# EAGLE board SparkFun RTK Facet - External Connector (EAGLE 9.6.2)
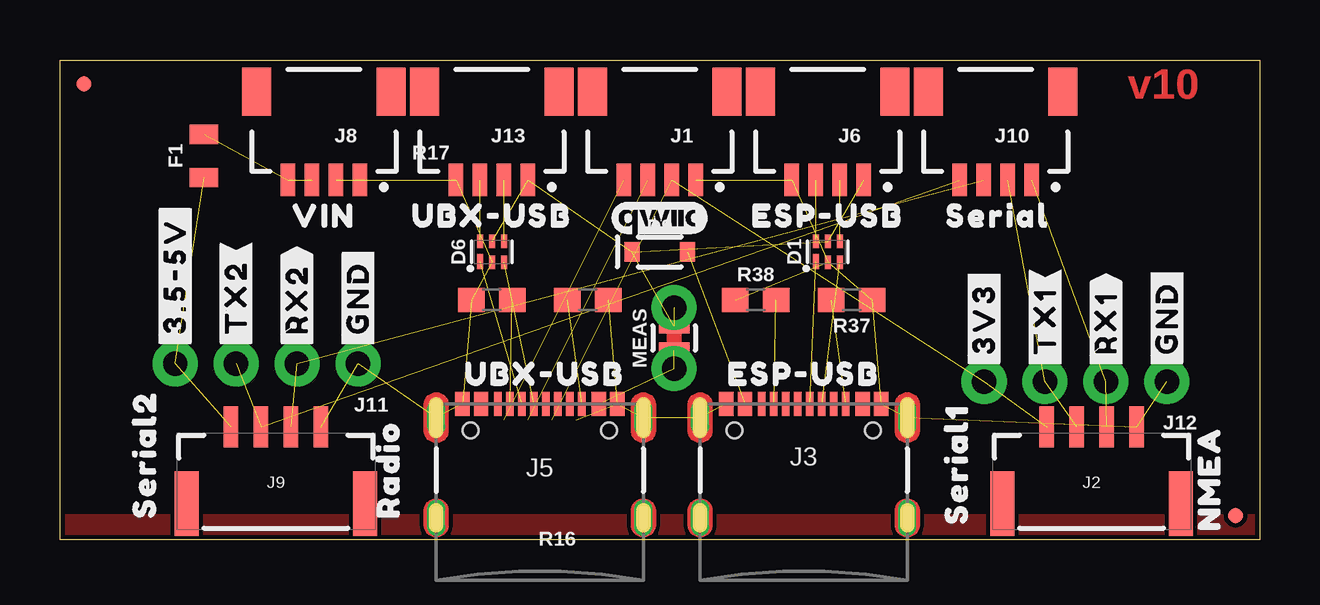
[diagram p0: board, top side]
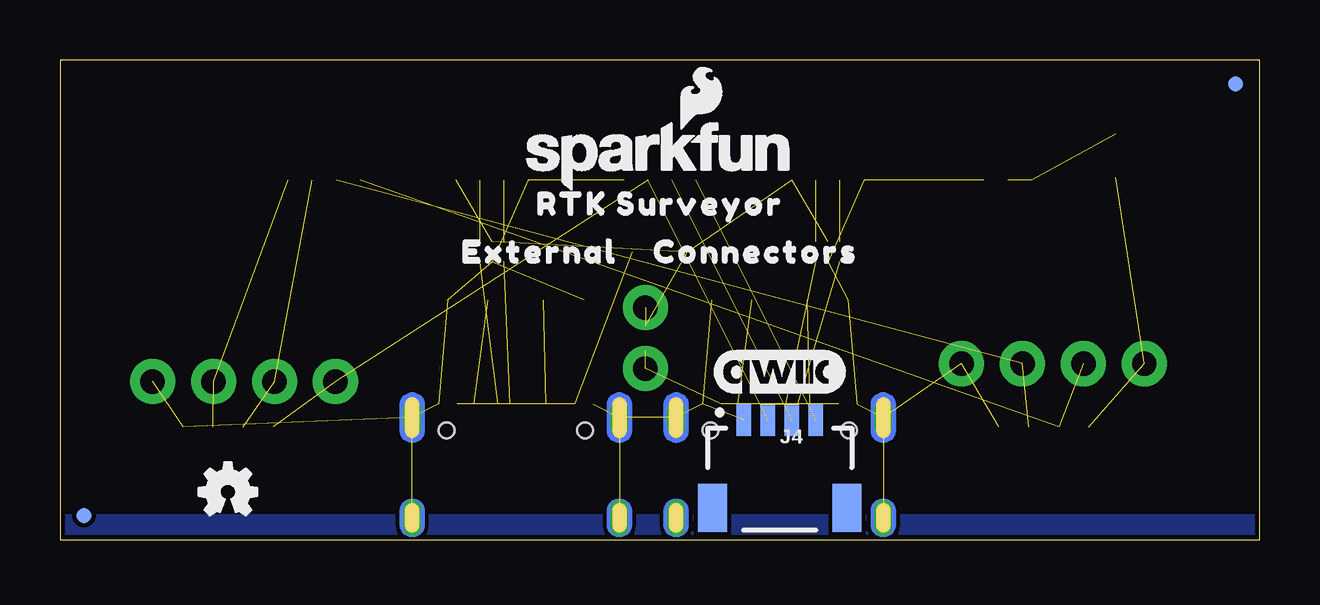
[diagram p1: board, bottom side, seen from below]

Size 50 x 20 mm. Coordinates in mm from the lower left corner, seen from the top.
Outline: 0,20 50,20 50,0 0,0 0,20
Copper layers (1*2*15*16): Top 0.035559375mm / dielectric 0.47751875mm / Horz/GND 0.035559375mm / dielectric 0.47751875mm / Vert 0.035559375mm / dielectric 0.47751875mm / Bottom 0.035559375mm
Design rules "SparkFun-4-layer-TIGHT *": minimum track width 7mil, minimum drill 12mil, track to track 7mil, track to pad 7mil, pad to pad 7mil, via to via 7mil, smd to smd 7mil, copper to edge 7mil, drill to drill 7mil, minimum pad ring 7mil, minimum via ring 7mil, stop-mask expansion 4mil, vias tented up to drill 25mil, thermal gap 10mil
Net classes: 1 power: width 0.559 mm; 2 3.3V: width 0.559 mm; 3 RF: width 0.35 mm, clearance 0.203 mm
tKeepout: area 0,0 to 2,20
bKeepout: area 48,0 to 50,20; area 0,0 to 2,20

## Footprints (pad centres in the part's own frame; a part is rotated, then mirrored left to right if it is on the bottom)
SOT886 = smd 0.61 x 0.25: 1 -0.405,0.5 | smd 0.56 x 0.25: 2 -0.43,0; 3 -0.43,-0.5; 4 0.43,-0.5; 5 0.43,0; 6 0.43,0.5
SOD-323 = smd 0.63 x 0.83: A 1.15,0; C -1.15,0
0805 = smd 0.8 x 1.2: 1 -0.9,0; 2 0.9,0
JST04_1MM_RA = smd 0.6 x 1.35: 1 -1.5,0; 2 -0.5,0; 3 0.5,0; 4 1.5,0 | smd 1.2 x 2: NC1 2.8,-3.675; NC2 -2.8,-3.675
JST-4-SMD-1.25MM-LOCKING = smd 0.6 x 1.7: 1 -1.875,3.3; 2 -0.625,3.3; 3 0.625,3.3; 4 1.875,3.3 | smd 1 x 2.7: NC1 3.725,0.1; NC2 -3.725,0.1
USB-C-16P-2LAYER-PADS = smd 0.3 x 1: A5 -1.25,-0.34; A6 -0.25,-0.34; A7 0.25,-0.34; A8 1.25,-0.34; B5 1.75,-0.34; B6 0.75,-0.34; B7 -0.75,-0.34; B8 -1.75,-0.34 | smd 0.6 x 1: GND -3.225,-0.34; GND2 3.225,-0.34; VBUS1 -2.45,-0.34; VBUS2 2.45,-0.34 | drill 0.4 pad 0.6 long: SHLD1 -4.318,-0.915; SHLD2 4.318,-0.915; SHLD3 -4.318,-5.095; SHLD4 4.318,-5.095 | hole 0.65: -2.89,-1.445; 2.89,-1.445
1X04_NO_SILK = drill 1.016 pad 1.88: 1 0,0; 2 2.54,0; 3 5.08,0; 4 7.62,0
FIDUCIAL-MICRO = smd 0.635 x 0.635: 1 0,0
COMBO-JUMPER_2_NC_TRACE = smd 0.635 x 1.27: 1 -0.508,0; 2 0.508,0 | drill 1.016 pad 1.88: 3 -1.27,0; 4 1.27,0
0603 = smd 1.1 x 1: 1 -0.85,0; 2 0.85,0

## Placement (x,y rotation side)
D1  PRTR5V0U2F  [SOT886]  32,12 90 top
D6  PRTR5V0U2F  [SOT886]  18,12 90 top
D9  3A/10V/280mV  [SOD-323]  25,12 0 top
F1  6V 0.5A  [0805]  6,16 90 top
FRAME1  FRAME-LETTER  [CREATIVE_COMMONS]  21,-10 0 top  (outside the outline)
J1  Qwiic  [JST04_1MM_RA]  25,15 180 top
J2  [JST-4-SMD-1.25MM-LOCKING]  43,1.4 0 top
J3  ESP32 USB  [USB-C-16P-2LAYER-PADS]  31,6 0 top
J4  Qwiic  [JST04_1MM_RA]  20,5 0 bottom
J5  u-blox USB  [USB-C-16P-2LAYER-PADS]  20,6 0 top
J6  [JST04_1MM_RA]  32,15 180 top
J8  [JST04_1MM_RA]  11,15 180 top
J9  [JST-4-SMD-1.25MM-LOCKING]  9,1.4 0 top
J10  [JST04_1MM_RA]  39,15 180 top
J11  [1X04_NO_SILK]  12.42,7.33 180 top
J12  [1X04_NO_SILK]  46.14,6.59 180 top
J13  [JST04_1MM_RA]  18,15 180 top
JP21  FIDUCIALUFIDUCIAL  [FIDUCIAL-MICRO]  49,1 0 top
JP61  FIDUCIALUFIDUCIAL  [FIDUCIAL-MICRO]  1,19 0 top
JP71  FIDUCIALUFIDUCIAL  [FIDUCIAL-MICRO]  49,1 0 bottom
JP81  FIDUCIALUFIDUCIAL  [FIDUCIAL-MICRO]  1,19 0 bottom
LOGO1  OSHW-LOGOMINI  [OSHW-LOGO-MINI]  43,2 0 bottom
LOGO2  SFE_LOGO_NAME_FLAME.1_INCH  [SFE_LOGO_NAME_FLAME_.1]  25,16 0 bottom
LOGO3  QWIIC_LOGO_CONNECTOR  [QWIIC_5.5MM]  20,7 0 bottom
MEAS  [COMBO-JUMPER_2_NC_TRACE]  25.6,8.4 90 top
R16  5.1k  [0603]  22,10 180 top
R17  5.1k  [0603]  18,10 0 top
R37  5.1k  [0603]  33,10 180 top
R38  5.1k  [0603]  29,10 0 top
U$1  [ESP#USB0]  32,13.5 0 top
U$2  [CONNECTORS1]  21,12 0 bottom
U$3  [SERIAL3]  39.1,13.5 0 top
U$4  [UBX#USB1]  18,13.5 0 top
U$5  [#3V3#0]  38.52,7 90 top
U$6  [VIN2]  11,13.5 0 top
U$7  [UBX#USB1]  20.2,6.9 0 top
U$8  [ESP#USB0]  31,6.9 0 top
U$9  [EXTERNAL0]  30,12 0 bottom
U$10  [RTK_SURVEYOR0]  25,14 0 bottom
U$23  [#3#5#5V#0]  4.8,7.84 90 top
U$29  [SERIAL10]  37.38,-0.03 90 top
U$30  [QWIIC_4MM]  25,13.4 0 top
U$38  [#GND#0]  12.42,7.84 90 top
U$39  [#RX2#2]  9.88,7.84 90 top
U$40  [#TX2#1]  7.34,7.84 90 top
U$43  [SERIAL20]  3.53,0.22 90 top
U$49  [NMEA1]  47.9,-0.3 90 top
U$50  [RADIO0]  13.69,0.22 90 top
U$65  [#TX1#1]  41.06,7 90 top
U$68  [#RX1#2]  43.6,7 90 top
U$82  [#GND#0]  46.14,7 90 top

## Library data of the parts
D1 D6 = SparkFun-IC-Power; PROD_ID: DIO-14084
D9 = SparkFun-DiscreteSemi; PROD_ID: DIO-14072
F1 = SparkFun-Fuses; PROD_ID: RES-13945
FRAME1 JP21 JP61 JP71 JP81 LOGO1-LOGO3 U$30 = SparkFun-Aesthetics
J1 = SparkFun-Connectors; PROD_ID: CONN-13694
J2 J9 = SparkFun-Connectors; PROD_ID: CONN-15303
J3 J5 = SparkFun-Connectors; PROD_ID: CONN-14122
J4 = SparkFun-Connectors; PROD_ID: CONN-13694; VALUE: Qwiic Right Angle
J6 J8 J10 J13 = SparkFun-Connectors; PROD_ID: CONN-10310; SF_ID: PRT-10208
J11 J12 = SparkFun-Connectors
MEAS = SparkFun-Jumpers
R16 R17 R37 R38 = SparkFun-Resistors; PROD_ID: RES-12083
U$1-U$10 U$23 U$29 U$38-U$40 U$43 U$49 U$50 U$65 U$68 U$82 = output

## Nets
3.3V [power]: J1.2 J2.1 J4.2 J12.4
CC1: J5.A5 R17.2
CC2: J5.B5 R16.2
CC3: J3.B5 R37.2
CC4: J3.A5 R38.2
ESP1_D_N: D1.1 J3.A7 J3.B7
ESP1_D_P: D1.3 J3.A6 J3.B6
ESP_21/SDA: J1.3 J4.3
ESP_22/SCL: J1.4 J4.4
ESP_D_N: D1.6 J6.3
ESP_D_P: D1.4 J6.2
EXTERNAL_SERIAL1_RXI: J2.3 J10.1 J12.2
EXTERNAL_SERIAL1_TXO: J2.2 J10.2 J12.3
GND: D1.2 D6.2 J1.1 J2.4 J3.GND J3.GND2 J3.SHLD1 J3.SHLD2 J3.SHLD3 J3.SHLD4 J4.1 J5.GND J5.GND2 J5.SHLD1 J5.SHLD2 J5.SHLD3 J5.SHLD4 J6.4 J8.1 J8.2 J9.4 J11.1 J12.1 J13.4 R16.1 R17.1 R37.1 R38.1
N$3 [power]: F1.1 J9.1 J11.4
N$4 [power]: J5.VBUS1 J5.VBUS2 MEAS.1 MEAS.3
N$32 [power]: D9.A J3.VBUS1 J3.VBUS2
UBX1_D_N: D6.1 J5.A7 J5.B7
UBX1_D_P: D6.3 J5.A6 J5.B6
UBX_D_N: D6.6 J13.3
UBX_D_P: D6.4 J13.2
V_BATT [power]: F1.2 J8.3 J8.4
VIN [power]: D1.5 D6.5 D9.C J6.1 J13.1 MEAS.2 MEAS.4
ZED-RXI2: J9.3 J10.3 J11.2
ZED-TXO2: J9.2 J10.4 J11.3

## Tracks (layer width: path | path; a pad name or v marks a point on that pad's centre or on a via)
3.3V  (3 unrouted)
CC1  (1 unrouted)
CC2  (1 unrouted)
CC3  (1 unrouted)
CC4  (1 unrouted)
ESP1_D_N  (2 unrouted)
ESP1_D_P  (2 unrouted)
ESP_21/SDA  (1 unrouted)
ESP_22/SCL  (1 unrouted)
ESP_D_N  (1 unrouted)
ESP_D_P  (1 unrouted)
EXTERNAL_SERIAL1_RXI  (2 unrouted)
EXTERNAL_SERIAL1_TXO  (2 unrouted)
GND  (24 unrouted)
  pour Top (isolate 0.152, rank 4): 0,1 50,1 50,0 0,0
  pour Bottom (isolate 0.152, rank 4): 0,1 50,1 50,0 0,0
N$3  (2 unrouted)
N$4  (3 unrouted)
N$32  (2 unrouted)
UBX1_D_N  (2 unrouted)
UBX1_D_P  (2 unrouted)
UBX_D_N  (1 unrouted)
UBX_D_P  (1 unrouted)
V_BATT  (2 unrouted)
VIN  (6 unrouted)
ZED-RXI2  (2 unrouted)
ZED-TXO2  (2 unrouted)

## Text on the board
Top: v10
tDocu: Board thickness is 1.6mm | 4 Layer Board | No clean process